# Altium PCB Motherboard.PcbDoc
Units mm, origin at the board's own origin, x right, y up, seen from the top; angles counter-clockwise.
Board outline 177.04 x 126.34 mm, 2 copper layers (Top Layer, Bottom Layer); 49 components, 103 nets, 464 pads, 0 vias.
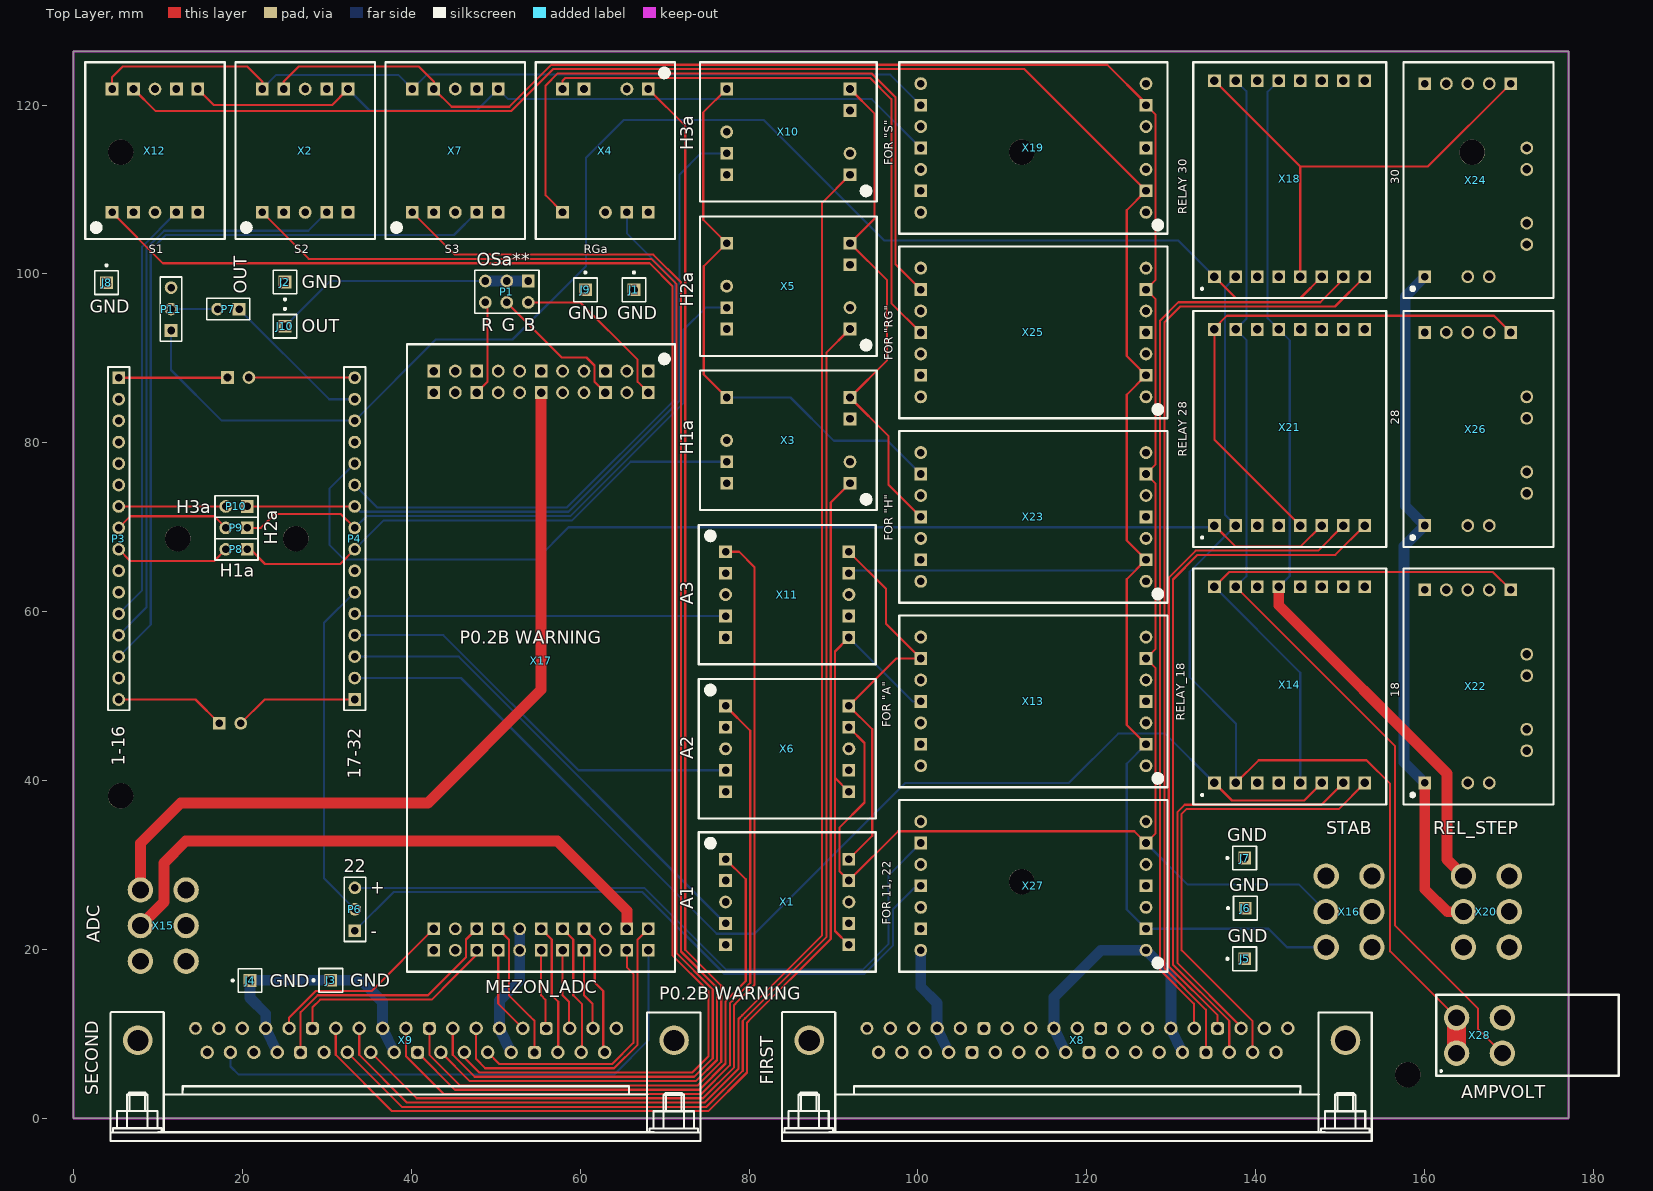
[diagram p0: Top Layer view]
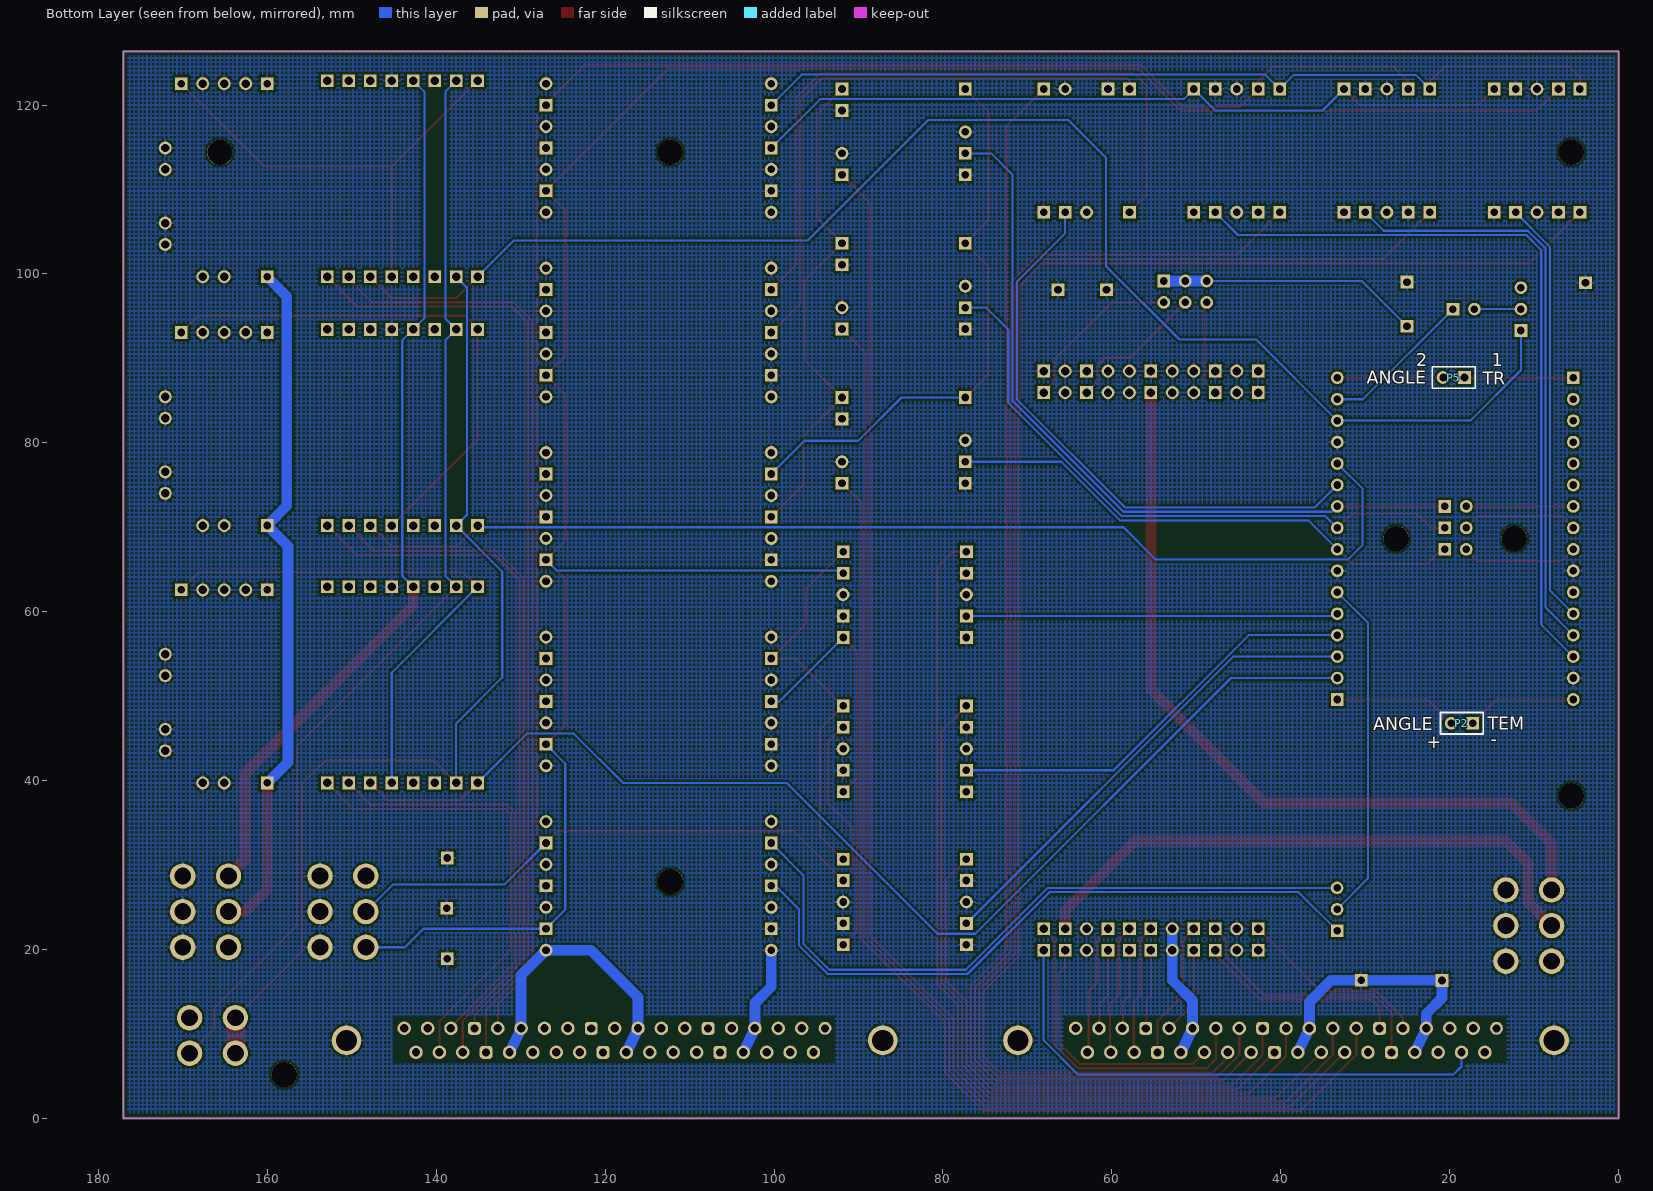
[diagram p1: Bottom Layer view, seen from below]

## Layer stack, top to bottom
Top Solder: solder mask 0.0102, Solder Resist, Dk 3.5
Top Layer: signal copper 0.0356
Dielectric 1: dielectric 0.32, FR-4, Dk 4.8
Bottom Layer: signal copper 0.0356
Bottom Solder: solder mask 0.0102, Solder Resist, Dk 3.5

## Board outline
0,0 177.038,0 177.038,126.34 0,126.34

## Design rules (kind name [scope] priority, off if disabled: settings)
Clearance [All] p1: gap=0.125
PolygonConnect [All] p1: connectstyle=Relief reliefconductorwidth=0.254 reliefentries=4 polygonreliefangle="90 Angle" airgapwidth=0.254
RoutingVias [All] p1: holewidth=0.711 width=1.27 viastyle="Through Hole" minholewidth=0.711 minwidth=1.27 maxholewidth=0.711 maxwidth=1.27
SolderMaskExpansion [All] p1: expansion=0.102
Width [All] p1: maxlimit=2.254 minlimit=0.127 preferedwidth=0.254
29 further rules are at their usual default settings.

## Components (designator, comment, footprint, x,y, rotation, side; value= is the part's Value field where it differs from the comment)
J1 "GND" PIN1 66.37,98.12 r0 top
J2 "GND" PIN1 25.044,99.035 r180 top
J3 "GND" PIN1 30.48,16.358 r90 top
J4 "GND" PIN1 20.904,16.332 r90 top
J5 "GND" PIN1 138.684,18.898 r90 top
J6 "GND" PIN1 138.76,24.902 r90 top
J7 "GND" PIN1 138.684,30.836 r90 top
J8 "GND" PIN1 3.912,98.958 r0 top
J9 "GND" PIN1 60.626,98.12 r0 top
J10 "OUT" PIN1 25.044,93.802 r0 top (schematic designator J4)
P1 "ADC_CH" HDR2X3 53.848,99.162 r180 top
P2 "TEM" HDR1X2 17.272,46.787 r0 bottom
P3 "1-16" HDR1X16 5.359,87.706 r270 top
P4 "17-32" HDR1X16 33.299,49.606 r90 top
P5 "TR" HDR1X2 18.237,87.732 r0 bottom
P6 "22" HDR1X3 33.325,22.225 r90 top
P7 "" HDR1X2 19.609,95.834 r180 top
P8 "H1a" HDR1X2 20.574,67.386 r180 top
P9 "H2a" HDR1X2 20.574,69.926 r180 top
P10 "H3a" HDR1X2 20.574,72.466 r180 top
P11 "" HDR1X3 11.557,93.294 r90 top
X1 "A1" MEZON_V 77.216,30.709 r0 top
X2 "S2" MEZON_V 22.352,107.29 r90 top
X3 "H1a" MEZON_H 91.948,75.209 r180 top
X4 "RGa" MEZON_H 68.072,121.895 r270 top
X5 "H2a" MEZON_H 91.948,93.472 r180 top
X6 "A2" MEZON_V 77.216,48.844 r0 top
X7 "S3" MEZON_V 40.132,107.29 r90 top
X8 "FIRST" CHEAP_CONN_FEMALE 150.622,9.246 r180 top
X9 "SECOND" CHEAP_CONN_FEMALE 71.12,9.246 r180 top
X10 "H3a" MEZON_H 91.948,111.735 r180 top
X11 "A3" MEZON_V 77.216,67.107 r0 top
X12 "S1" MEZON_V 4.572,107.29 r90 top
X13 "FOR \"A\"" MEZON_V+H 127,41.758 r180 top
X14 "RELAY_18" RELAY_MODULE 152.908,39.726 r90 top
X15 "ADC" POWER 15.545,22.835 r90 top
X16 "STAB" POWER 155.956,24.486 r90 top
X17 "MEZON_ADC" MEZON_ADC 68.072,88.494 r270 top
X18 "RELAY 30" RELAY_MODULE 152.908,99.67 r90 top
X19 "FOR \"S\"" MEZON_V+H 127,107.29 r180 top
X20 "REL_STEP" POWER 172.212,24.486 r90 top
X21 "RELAY 28" RELAY_MODULE 152.908,70.206 r90 top
X22 "18" MEZON_STEP-UP 160.02,39.726 r90 top
X23 "FOR \"H\"" MEZON_V+H 127,63.602 r180 top
X24 "30" MEZON_STEP-UP 160.02,99.67 r90 top
X25 "FOR \"RG\"" MEZON_V+H 127,85.446 r180 top
X26 "28" MEZON_STEP-UP 160.02,70.206 r90 top
X27 "FOR 11, 22" MEZON_V+H 127,19.914 r180 top
X28 "AMPVOLT" AMP_VOLTMETER 163.779,7.722 r90 top

## Footprints (in the part's own frame and the unit in brackets; to place one, negate y for a bottom-side part, rotate by r counter-clockwise, add the part's x,y. Pads: shape width x height; smd on the part's side, far side on the other; paste and mask are expansions set on the pad)
AMP_VOLTMETER [mm] "AMP_VOLTMETER"
  round 3 hole 2: 1(0,0) 2(0,-5.423) 3(4.2,-5.423) 4(4.2,0)
  silkscreen extent -2.66,-19.17 6.94,2.42
CHEAP_CONN_FEMALE [mm] "CHEAP_CONN_FEMALE"
  round 1.6 hole 1: 1(6.833,-1.422) 2(9.601,-1.422) 3(12.37,-1.422) 5(17.907,-1.422) 6(20.676,-1.422) 7(23.444,-1.422) 8(26.213,-1.422) 10(31.75,-1.422) 11(34.519,-1.422) 12(37.287,-1.422) 13(40.056,-1.422) 15(45.593,-1.422) 16(48.362,-1.422) 17(51.13,-1.422) 18(53.899,-1.422) 20(8.23,1.422) 21(10.998,1.422) 22(13.767,1.422) 24(19.304,1.422) 25(22.073,1.422) 26(24.841,1.422) 27(27.61,1.422) 29(33.147,1.422) 30(35.916,1.422) 31(38.684,1.422) 32(41.453,1.422) 34(46.99,1.422) 35(49.759,1.422) 36(52.527,1.422) 37(55.296,1.422)
  rrect50% 1.524x1.524 hole 0.965: 4(15.138,-1.422) 9(28.981,-1.422) 14(42.824,-1.422) 23(16.535,1.422) 28(30.378,1.422) 33(44.221,1.422)
  round 1.524 hole 0.965: 19(56.667,-1.422)
  round 3.5 hole 2.5: 38(0,0) 39(63.5,0)
  silkscreen extent -3.11,-3.36 66.72,11.92
HDR1X2 [mm] "Connector; Header; 2 Position"
  rect 1.5x1.5 hole 0.9: 1(0,0)
  round 1.5 hole 0.9: 2(2.54,0)
  silkscreen extent -1.27,-1.27 3.81,1.27
HDR1X3 [mm] "Connector; Header; 3 Position"
  rect 1.5x1.5 hole 0.9: 1(0,0)
  round 1.5 hole 0.9: 2(2.54,0) 3(5.08,0)
  silkscreen extent -1.27,-1.27 6.35,1.27
HDR1X16 [mm] "Connector; Header; 16 Position"
  rect 1.5x1.5 hole 0.9: 1(0,0)
  round 1.5 hole 0.9: 2(2.54,0) 3(5.08,0) 4(7.62,0) 5(10.16,0) 6(12.7,0) 7(15.24,0) 8(17.78,0) 9(20.32,0) 10(22.86,0) 11(25.4,0) 12(27.94,0) 13(30.48,0) 14(33.02,0) 15(35.56,0) 16(38.1,0)
  silkscreen extent -1.27,-1.27 39.37,1.27
HDR2X3 [mm] "Connector; Header; 3x2 Position"
  rect 1.5x1.5 hole 0.9: 1(0,0)
  round 1.5 hole 0.9: 2(0,2.54) 3(2.54,0) 4(2.54,2.54) 5(5.08,0) 6(5.08,2.54)
  silkscreen extent -1.27,-1.27 6.35,3.81
MEZON_ADC [mm] "MEZON_ADC"
  rect 1.5x1.5 hole 1: 1(0,0) 2(2.54,0) 5(0,-5.08) 6(2.54,-5.08) 11(0,-12.7) 12(2.54,-12.7) 17(0,-20.32) 18(2.54,-20.32) 21(0,-25.4) 22(2.54,-25.4) 23(66.04,-25.4) 24(68.58,-25.4) 27(66.04,-20.32) 28(68.58,-20.32) 29(66.04,-17.78) 30(68.58,-17.78) 33(66.04,-12.7) 34(68.58,-12.7) 35(66.04,-10.16) 36(68.58,-10.16) 37(66.04,-7.62) 38(68.58,-7.62) 41(66.04,-2.54) 42(68.58,-2.54) 43(66.04,0) 44(68.58,0)
  round 1.524 hole 1: 3(0,-2.54) 4(2.54,-2.54) 7(0,-7.62) 8(2.54,-7.62) 9(0,-10.16) 10(2.54,-10.16) 13(0,-15.24) 14(2.54,-15.24) 15(0,-17.78) 16(2.54,-17.78) 19(0,-22.86) 20(2.54,-22.86) 25(66.04,-22.86) 26(68.58,-22.86) 31(66.04,-15.24) 32(68.58,-15.24) 39(66.04,-5.08) 40(68.58,-5.08)
  silkscreen extent -3.18,-28.57 71.12,3.18
MEZON_H [mm]
  rect 1.5x1.5 hole 0.9: 1(0,0) 3(0,-7.62) 4(0,-10.16) 5(14.605,-10.16) 7(14.605,-2.54) 8(14.605,0)
  round 1.524 hole 0.9: 2(0,-2.54) 6(14.605,-5.08)
  silkscreen extent -3.18,-13.33 17.78,3.18
MEZON_STEP-UP [mm] "MEZON_STEP-UP"
  rect 1.5x1.5 hole 0.9: 1(0,0) 8(22.86,-10.16) 12(22.86,0)
  round 1.524 hole 1: 2(0,-5.08) 3(0,-7.62) 4(3.81,-12.065) 5(6.35,-12.065) 6(12.7,-12.065) 7(15.24,-12.065) 9(22.86,-7.62) 10(22.86,-5.08) 11(22.86,-2.54)
  silkscreen extent -2.54,-15.24 25.4,2.54
MEZON_V [mm]
  rect 1.5x1.5 hole 0.9: 1(0,0) 2(0,-2.54) 4(0,-7.62) 5(0,-10.16) 6(14.605,-10.16) 7(14.605,-7.62) 9(14.605,-2.54) 10(14.605,0)
  round 1.524 hole 0.9: 3(0,-5.08) 8(14.605,-5.08)
  silkscreen extent -3.17,-13.33 17.78,3.17
MEZON_V+H [mm] "MEZON_V+H"
  round 1.524 hole 0.9: 1(0,0) 3(0,-5.08) 5(0,-10.16) 7(0,-15.24) 8(26.67,-15.24) 10(26.67,-10.16) 12(26.67,-5.08) 14(26.67,0)
  rect 1.5x1.5 hole 0.9: 2(0,-2.54) 4(0,-7.62) 6(0,-12.7) 9(26.67,-12.7) 11(26.67,-7.62) 13(26.67,-2.54)
  silkscreen extent -2.54,-17.78 29.21,2.54
PIN1 [mm] "Connector; Plug"
  rect 1.5x1.5 hole 0.9: 1(0,0)
  silkscreen extent -1.4,-1.4 1.4,2.17
POWER [mm] "POWER"
  round 3 hole 2: 1(4.217,7.62) 2(0,7.62) 3(-4.217,7.62) 4(4.217,2.198) 5(0,2.198) 6(-4.217,2.198)
RELAY_MODULE [mm]
  rect 1.5x1.5 hole 1: 1(0,17.805) 2(0,15.265) 3(0,12.725) 4(0,10.185) 5(0,7.645) 6(0,5.105) 7(0,2.54) 8(0,0) 9(23.216,0.025) 10(23.216,2.565) 11(23.216,5.105) 12(23.216,7.645) 13(23.216,10.185) 14(23.216,12.725) 15(23.216,15.265) 16(23.216,17.805)
  silkscreen extent -2.54,-2.54 25.4,20.32

## Part data
J1 J2 J3 J4 J5 J6 J7 J8 J9 J10: library part Socket, "Socket"
P1: library part "Header 3X2", "Header, 3-Pin, Dual row"
P2 P5 P7 P8 P9 P10: library part "Header 2", "Header, 2-Pin"
P3 P4: library part "Header 16", "Header, 16-Pin"
P6 P11: library part "Header 3", "Header, 3-Pin"
X1 X2 X6 X7: library part MEZON_V_+15
X3 X4 X5 X10: library part MEZON_H
X8 X9: library part CHEAP_CON_37_FEMALE
X11 X12: library part MEZON_V
X13 X19 X23 X25 X27: library part MEZON_V+H
X14 X18 X21: library part MEZON_RELAY
X15 X16 X20: library part POWER
X22 X24 X26: library part MEZON_STEP-UP
X28: library part AMP_VOLTMETER

## Free pads (board coordinates)
  round 3 hole 3 unplated: 0(5.588,38.202) 0(5.588,114.402) 0(12.344,68.656) 0(26.314,68.656) 0(112.268,28.042) 0(112.268,114.402) 0(157.988,5.182) 0(165.608,114.402)

## Nets (pads, with @x,y where several pads share a name; then routed paths per layer and width w, separated by ;. In a path a pad name is that pad's centre, name@x,y a point inside that pad or via, vN(x,y) a via of type N, cw(c..) or ccw(c..) an arc to the next point about the centre after c; other vN are vias at no path point)
AMPER_+: X14.15 X18.15 X21.15 X28.2 | length 130.3
  Top Layer w0.254: X14.15 156.464,44.12 156.464,22.86 166.294,13.03 166.294,10.63 X28.2
  Bottom Layer w0.254: X14.15 138.887,64.186 138.887,70.612 138.913,70.637 138.913,92.151 X21.15 138.887,94.666 138.887,121.641 X18.15
AMPER_-: X14.2 X18.2 X21.2 X28.1 X28.4 | length 121.2
  Top Layer w0.254: X14.2 140.335,42.418 153.111,42.418 155.905,39.624 155.905,19.796 X28.4
  Top Layer w2.254: X28.1 X28.4
  Bottom Layer w0.254: X14.2 137.643,46.761 132.182,52.222 132.182,64.745 X21.2 136.347,71.501 136.347,98.374 X18.2
GND: J1.1 J2.1 J3.1 J4.1 J5.1 J6.1 J7.1 J8.1 J9.1 P3.10 P3.15 P4.7 P4.13 X1.2 X1.3 X1.5 X1.7 X1.8 X2.2 X2.3 X2.5 X2.7 X2.8 X3.2 X3.3 X3.6 X3.8 X4.2 X4.3 X4.6 X4.8 X5.2 X5.3 X5.6 X5.8 X6.2 X6.3 X6.5 X6.7 X6.8 X7.2 X7.3 X7.5 X7.7 X7.8 X8.6 X8.11 X8.16 X8.24 X8.29 X8.34 X8.38 X8.39 X9.6 X9.11 X9.16 X9.24 X9.29 X9.34 X9.38 X9.39 X10.2 X10.3 X10.6 X10.8 X11.2 X11.3 X11.5 X11.7 X11.8 X12.2 X12.3 X12.5 X12.7 X12.8 X13.1 X13.3 X13.4 X13.5 X13.7 X13.8 X13.10 X13.12 X13.13 X13.14 X14.12 X15.4 X15.5 X15.6 X16.4 X16.5 X16.6 X17.1 X17.3 X17.4 X17.5 X17.7 X17.8 X17.9 X17.10 X17.11 X17.13 X17.14 X17.15 X17.16 X17.17 X17.19 X17.20 X17.21 X17.22 X17.24 X17.25 X17.26 X17.31 X17.32 X17.39 X17.40 X18.12 X19.1 X19.3 X19.4 X19.5 X19.7 X19.8 X19.10 X19.12 X19.13 X19.14 X20.4 X20.5 X20.6 X21.12 X22.2 X22.3 X22.4 X22.5 X22.6 X22.7 X22.9 X22.10 X22.11 X22.12 X23.1 X23.3 X23.4 X23.5 X23.7 X23.8 X23.10 X23.12 X23.13 X23.14 X24.2 X24.3 X24.4 X24.5 X24.6 X24.7 X24.9 X24.10 X24.11 X24.12 X25.1 X25.3 X25.4 X25.5 X25.7 X25.8 X25.10 X25.12 X25.13 X25.14 X26.2 X26.3 X26.4 X26.5 X26.6 X26.7 X26.9 X26.10 X26.11 X26.12 X27.1 X27.3 X27.4 X27.5 X27.7 X27.8 X27.10 X27.12 X27.13 X27.14 | length 95.4
  Bottom Layer w1.27: X9.34 X9.16 22.758,12.395 20.904,14.249 J4.1 20.93,16.358 J3.1 34.036,16.358 36.601,13.792 X9.11 X9.29 ; X9.24 X9.6 50.444,13.97 52.832,16.358 X17.32 X17.31 ; X27.14 100.33,15.596 102.26,13.665 X8.16 X8.34 ; X8.29 X8.11 116.103,14.351 121.666,19.914 X27.1 129.946,16.967 X8.6 X8.24
HIGH_A: X1.10 X6.10 X11.10 X13.9 | length 47.4
  Top Layer w0.254: X1.10 94.59,33.477 94.59,46.076 X6.10 97.434,54.458 X13.9 96.215,58.572 96.215,62.713 X11.10
HIGH_H: X3.5 X5.5 X10.5 X23.9 | length 67.8
  Top Layer w0.254: X3.5 74.625,88.087 74.625,100.914 X5.5 74.574,106.401 74.574,119.126 X10.5
  Bottom Layer w0.254: X3.5 84.912,85.369 90.043,80.239 96.393,80.239 X23.9
HIGH_RG: X4.5 X25.9 | length 83.1
  Top Layer w0.254: X4.5 55.905,109.296 55.905,122.301 57.353,123.749 94.495,123.749 97.358,120.886 97.358,101.117 X25.9
HIGH_S: X2.10 X7.10 X12.10 X19.9 | length 102.9
  Top Layer w0.254: X12.10 4.572,123.292 5.842,124.562 20.574,124.562 22.352,122.784 X2.10
  Bottom Layer w0.254: X2.10 24.028,123.571 38.456,123.571 X7.10 41.834,123.596 96.723,123.596 X19.9
LOW_A: X1.6 X6.6 X11.6 X13.11 | length 51.7
  Top Layer w0.254: X1.6 90.17,22.2 90.17,40.335 ; X6.6 90.17,40.335 ; X11.6 90.17,55.296 90.17,40.335
  Bottom Layer w0.254: X11.6 99.39,49.378 X13.11
LOW_H: X3.4 X5.4 X10.4 X23.11 | length 60.2
  Top Layer w0.254: X10.4 94.869,118.974 94.869,106.553 X5.4 96.342,99.238 96.342,89.764 X3.4 96.495,80.823 96.495,75.057 X23.11
LOW_RG: X4.4 X25.11 | length 70.1
  Top Layer w0.254: X4.4 57.912,122.86 58.242,123.19 94.336,123.19 96.85,120.675 96.85,96.545 X25.11
LOW_S: X2.6 X7.6 X12.6 X19.11 | length 92.2
  Top Layer w0.254: X12.6 16.637,119.99 30.607,119.99 X2.6
  Bottom Layer w0.254: X2.6 35.052,119.355 47.752,119.355 X7.6 51.486,120.701 94.539,120.701 X19.11
NetJ10_1: J10.1 P1.1 P1.3 P1.5 | length 31
  Bottom Layer w0.254: J10.1 30.404,99.162 P1.5
  Bottom Layer w1.27: P1.5 P1.3 P1.1
NetP6_1: P6.1 X27.11 | length 79.7
  Bottom Layer w0.254: P6.1 37.897,26.797 67.379,26.797 77.082,17.094 93.657,17.094 97.028,20.465 97.028,24.74 99.822,27.534 X27.11
NetP6_3: P6.3 X27.9 | length 82
  Bottom Layer w0.254: P6.3 67.589,27.305 77.292,17.602 93.447,17.602 96.52,20.676 96.52,28.804 X27.9
P0.0: X8.15
P0.0_2: X9.15 X17.23 | length 22.8
  Top Layer w0.254: X9.15 25.527,11.913 28.702,15.088 34.544,15.088 35.306,15.088 X17.23
P0.1: X8.33
P0.1_2: X9.33 X17.27 | length 30.9
  Top Layer w0.254: X9.33 26.899,12.566 28.912,14.58 41.986,14.58 46.482,19.075 46.482,21.184 X17.27
P0.2: X8.14
P0.2_2: X9.14 X17.28 | length 25
  Top Layer w0.254: X9.14 28.296,13.157 29.21,14.072 42.418,14.072 44.853,16.506 45.212,16.866 47.752,19.406 X17.28
P0.3: X8.32
P0.3_2: X9.32
P0.4: X8.13
P0.4_2: X3.1 X9.13 | length 132.1
  Top Layer w0.254: X9.13 31.064,7.525 37.725,0.864 75.177,0.864 79.756,5.443 79.756,10.008 ; 79.756,9.246 79.756,11.347 79.912,11.503 89.662,21.253 89.662,72.923 X3.1
P0.5: X8.31
P0.5_2: X5.1 X9.31 | length 144.8
  Top Layer w0.254: X9.31 38.887,1.372 74.966,1.372 79.248,5.653 79.248,10.008 ; 79.248,9.525 79.248,11.557 79.553,11.862 89.154,21.463 89.154,76.352 89.154,90.678 X5.1
P0.6: X8.12
P0.6_2: X9.12 X10.1 | length 164
  Top Layer w0.254: X9.12 33.833,7.525 39.478,1.88 74.756,1.88 78.74,5.864 78.74,10.008 ; 78.74,9.347 78.74,11.767 79.194,12.221 88.646,21.673 88.646,94.539 88.646,108.433 X10.1
P0.7: X8.30
P0.7_2: X9.30 X11.1 | length 111.2
  Top Layer w0.254: X9.30 40.64,2.388 74.545,2.388 78.232,6.074 78.232,10.008 78.232,13.429 78.363,13.56 80.645,15.842 80.645,65.278 78.816,67.107 X11.1
P1.0: X8.10
P1.0_2: X6.1 X9.10 | length 89.7
  Top Layer w0.254: X9.10 39.37,7.355 43.83,2.896 74.335,2.896 77.724,6.285 77.724,10.008 77.724,13.64 78.003,13.919 80.137,16.053 80.137,42.748 80.137,45.923 X6.1
P1.1: X8.28
P1.1_2: X1.1 X9.28 | length 65.8
  Top Layer w0.254: X9.28 45.161,3.404 74.124,3.404 77.216,6.495 77.216,10.008 77.216,13.886 77.626,14.296 79.604,16.274 79.604,28.321 X1.1
P1.2: X8.9
P1.2_2: X4.1 X9.9 | length 160.2
  Top Layer w0.254: X9.9 42.139,7.525 45.752,3.912 73.914,3.912 76.708,6.706 76.708,11.1 ; X4.1 72.441,117.526 72.441,99.263 72.441,19.972 76.153,16.26 76.708,15.704 76.708,10.008
P1.3: X8.27
P1.3_2: X7.1 X9.27 | length 164.2
  Top Layer w0.254: X7.1 45.136,102.286 53.111,102.286 68.645,102.286 71.933,98.998 71.933,19.761 75.794,15.9 76.2,15.494 76.2,10.008 76.2,6.916 73.704,4.42 46.914,4.42 X9.27
P1.4: X8.8
P1.4_2: X2.1 X9.8 | length 181.9
  Top Layer w0.254: X2.1 27.864,101.778 34.29,101.778 68.435,101.778 71.425,98.788 71.425,19.551 75.434,15.541 75.692,15.284 75.692,10.008 75.692,7.126 73.493,4.928 47.504,4.928 44.907,7.525 X9.8
P1.5: X8.26
P1.5_2: X9.26 X12.1 | length 194
  Top Layer w0.254: X12.1 10.592,101.27 55.016,101.27 68.224,101.27 70.917,98.577 70.917,19.34 75.075,15.182 75.184,15.073 75.184,10.008 75.184,7.337 73.283,5.436 48.05,5.436 46.279,7.206 X9.26
P1.6: X8.7
P1.6_2: X9.7 X17.43 | length 38.6
  Top Layer w0.254: X9.7 47.676,7.036 48.768,5.944 64.008,5.944 66.802,8.738 66.802,18.644 66.802,21.184 X17.43
P1.7: X8.25
P1.7_2: X9.25 X17.42 | length 30.1
  Top Layer w0.254: X9.25 50.419,6.452 63.798,6.452 66.294,8.948 66.294,17.12 65.532,17.882 65.532,18.39 X17.42
P2.0: X8.5 X18.7 | length 109.5
  Top Layer w0.254: X8.5 132.664,10.719 132.664,13.589 128.676,17.577 128.676,94.488 130.835,96.647 147.65,96.647 150.368,99.365 X18.7
P2.0_2: X9.5 X17.30 | length 10.5
  Top Layer w0.254: X17.30 50.292,18.39 50.292,13.589 X9.5
P2.1: X8.23 X18.8 | length 114.4
  Top Layer w0.254: X8.23 134.087,12.885 129.184,17.787 129.184,94.278 131.046,96.139 149.377,96.139 X18.8
P2.1_2: X9.23 X17.29 | length 17.1
  Top Layer w0.254: X17.29 51.562,21.184 51.562,19.914 51.562,14.58 54.102,12.04 54.61,11.532 54.61,8.992 54.61,7.468 54.585,7.493 X9.23
P2.2: X8.4 X21.7 | length 79
  Top Layer w0.254: X8.4 135.484,12.206 129.692,17.998 129.692,64.033 132.893,67.234 147.396,67.234 X21.7
P2.2_2: X9.4 X17.34 | length 9.5
  Top Layer w0.254: X17.34 55.372,17.374 55.372,14.58 55.88,14.072 55.88,10.77 X9.4
P2.3: X8.22 X21.8 | length 84.1
  Top Layer w0.254: X8.22 136.855,11.553 130.2,18.208 130.2,63.823 133.103,66.726 149.428,66.726 X21.8
P2.3_2: X9.22 X17.33 | length 15.5
  Top Layer w0.254: X17.33 56.642,21.184 56.642,20.93 56.642,14.58 57.15,14.072 57.404,13.818 57.404,11.278 57.404,7.874 X9.22
P2.4: X8.3 X14.7 | length 49.8
  Top Layer w0.254: X8.3 138.252,10.875 130.708,18.418 130.708,36.271 131.572,37.135 147.777,37.135 X14.7
P2.4_2: X9.3 X17.36 | length 9.9
  Top Layer w0.254: X17.36 57.912,14.58 58.166,14.326 58.674,13.818 58.674,11.849 58.674,10.516 58.674,10.592 X9.3
P2.5: X8.21 X14.8 | length 54.9
  Top Layer w0.254: X8.21 139.624,11.506 131.216,19.914 131.216,36.061 131.782,36.627 149.809,36.627 X14.8
P2.5_2: X9.21 X17.35 | length 15.8
  Top Layer w0.254: X17.35 59.182,21.184 59.182,20.422 59.182,14.58 60.198,13.564 60.198,9.754 60.198,7.722 60.122,7.798 X9.21
P2.6: X8.2
P2.6_2: X9.2 X17.38 | length 9.7
  Top Layer w0.254: X17.38 60.452,14.58 61.468,13.564 61.468,11.849 61.468,10.719 X9.2
P2.7: X8.20
P2.7_2: X9.20 X17.37 | length 15.6
  Top Layer w0.254: X17.37 61.722,21.184 61.722,20.168 61.722,16.104 62.738,15.088 62.738,9.754 62.738,7.976 X9.20
PFI1: X8.36
PFI1_2: X9.36 X17.44 | length 63.9
  Bottom Layer w0.254: X9.36 18.593,6.147 19.558,5.182 64.008,5.182 68.072,9.246 X17.44
PFI2: X8.17
PFI2_2: X9.17
PFI3: X8.35
PFI3_2: X9.35
PH_A1: P4.3 X1.4 | length 57
  Bottom Layer w0.254: P4.3 45.618,54.686 X1.4
PH_A2: P4.4 X6.4 | length 50.5
  Bottom Layer w0.254: P4.4 43.797,57.226 59.799,41.224 X6.4
PH_A3: P4.5 X11.4 | length 44
  Bottom Layer w0.254: P4.5 33.579,59.487 X11.4
PH_DDA: P4.14 P11.1 X18.1 X18.6 | length 175.4
  Top Layer w0.254: X18.1 137.617,97.155 145.288,97.155 X18.6
  Bottom Layer w0.254: P11.1 11.557,88.621 17.551,82.626 P4.14 42.901,92.227 51.994,92.227 60.706,100.94 60.706,113.792 65.126,118.212 81.763,118.212 96.012,103.962 130.81,103.962 X18.1
PH_H1A: P4.8 P8.1 X3.7 | length 62.5
  Top Layer w0.254: P8.1 20.955,67.386 22.682,65.659 31.572,65.659 P4.8
  Bottom Layer w0.254: P4.8 36.728,70.815 59.044,70.815 65.978,77.749 X3.7
PH_H1B: P3.7 P10.2 | length 12.7
  Top Layer w0.254: P3.7 P10.2
PH_H2A: P4.9 P9.1 X5.7 | length 74
  Top Layer w0.254: P9.1 22.174,69.926 23.8,71.552 31.674,71.552 P4.9
  Bottom Layer w0.254: P4.9 34.696,71.323 58.834,71.323 72.263,84.753 72.263,93.421 74.854,96.012 X5.7
PH_H2B: P3.8 P9.2 | length 13.8
  Top Layer w0.254: P3.8 6.731,71.298 16.662,71.298 P9.2
PH_H3A: P4.10 P10.1 X10.7 | length 90.3
  Top Layer w0.254: P10.1 P4.10
  Bottom Layer w0.254: P4.10 33.934,71.831 58.623,71.831 71.755,84.963 71.755,111.735 74.295,114.275 X10.7
PH_H3B: P3.9 P8.2 | length 13.8
  Top Layer w0.254: P3.9 6.756,65.989 16.637,65.989 P8.2
PH_OBA: P4.6 P6.2 | length 40.6
  Bottom Layer w0.254: P4.6 29.667,58.674 29.667,28.426 P6.2@33.326,24.767
PH_OSA: P4.15 P7.1 | length 18.1
  Bottom Layer w0.254: P7.1 30.277,85.166 P4.15
PH_OSA_S: P7.2 P11.2 | length 5.5
  Bottom Layer w0.254: P11.2 P7.2
PH_PD: P4.2 X14.1 X14.6 | length 141
  Top Layer w0.254: X14.1 137.185,37.643 145.72,37.643 X14.6
  Bottom Layer w0.254: P4.2 45.896,52.146 76.173,21.869 80.645,21.869 98.501,39.726 117.856,39.726 123.698,45.568 129.261,45.568 X14.1
PH_RDA: P4.12 X21.1 X21.6 | length 132.7
  Top Layer w0.254: X21.1 137.566,67.742 145.339,67.742 X21.6
  Bottom Layer w0.254: P4.12 30.302,74.549 30.302,67.92 32.055,66.167 54.788,66.167 58.623,70.002 X21.1@135.103,70.002
PH_RGA: P4.11 X4.7 | length 68.9
  Bottom Layer w0.254: P4.11 35.966,72.339 58.413,72.339 71.247,85.173 71.247,99.085 65.532,104.8 X4.7
PH_S1: P3.12 X12.4 | length 50.4
  Bottom Layer w0.254: P3.12 8.128,62.535 8.128,103.226 X12.4
PH_S2: P3.13 X2.4 | length 70.3
  Bottom Layer w0.254: P3.13 8.636,60.503 8.636,103.015 10.735,105.114 27.797,105.114 X2.4
PH_S3: P3.14 X7.4 | length 90.2
  Bottom Layer w0.254: P3.14 9.144,58.471 9.144,102.805 10.946,104.606 45.069,104.606 X7.4
PH_TEM+: P2.2 P4.1 | length 14.7
  Top Layer w0.254: P2.2 22.631,49.606 P4.1
PH_TEM-: P2.1 P3.16 | length 13.1
  Top Layer w0.254: P3.16 14.453,49.606 P2.1
PH_TR1: P3.1 P5.1 | length 12.9
  Top Layer w0.254: P3.1 18.212,87.706 P5.1
PH_TR2: P4.16 P5.2 | length 12.5
  Top Layer w0.254: P5.2 33.274,87.732 P4.16
PWR_ANALOG: X15.1 X17.12 | length 95.7
  Top Layer w1.27: X15.1 7.925,32.588 12.7,37.363 41.986,37.363 55.372,50.749 X17.12
PWR_DIGITAL: X15.2 X17.41 | length 70
  Top Layer w1.27: X15.2 10.719,25.629 10.719,30.251 13.31,32.842 57.277,32.842 65.532,24.587 X17.41
PWR_RELAY: X14.13 X18.13 X20.1 X21.13 | length 105.4
  Top Layer w1.27: X14.13 142.723,60.757 162.636,40.843 162.636,30.659 X20.1
  Bottom Layer w0.254: X14.13 144.018,64.237 144.018,92.126 X21.13 141.402,94.742 141.402,121.564 X18.13
PWR_STAB++: X1.9 X2.9 X6.9 X7.9 X13.6 X16.2 X19.6 X23.6 X25.6 X27.6 | length 285
  Top Layer w0.254: X2.9 24.892,122.784 26.67,124.562 40.894,124.562 42.672,122.784 X7.9 44.78,119.786 51.606,119.786 56.584,124.765 122.41,124.765 127,120.175 X19.6 128.143,118.847 128.143,99.289 X25.6 128.143,97.003 128.143,77.445 X23.6 128.143,75.159 128.143,55.601 X13.6 128.143,53.315 128.143,33.757 X27.6 125.603,34.011 97.663,34.011 X1.9 90.69,29.3 90.69,34.429 93.675,37.414 93.675,44.45 X6.9
  Bottom Layer w0.254: X27.6 131.928,27.686 145.136,27.686 X16.2
PWR_STAB---: X11.9 X12.9 X13.2 X16.3 X19.2 X23.2 X25.2 X27.2 | length 282
  Top Layer w0.254: X12.9 9.728,119.278 51.816,119.278 56.794,124.257 112.573,124.257 X19.2 124.714,107.544 124.714,90.272 X25.2 124.714,85.7 124.714,68.428 X23.2 124.714,63.856 124.714,46.584 X13.2
  Bottom Layer w0.254: X11.9 92.126,64.872 125.73,64.872 X23.2 ; X13.2 124.714,42.012 124.714,24.74 X27.2 141.503,22.454 143.689,20.268 X16.3
PWR_STEP-UP: X20.2 X22.1 X24.1 X26.1 | length 82.2
  Top Layer w1.27: X22.1 160.02,27.153 162.687,24.486 X20.2
  Bottom Layer w1.27: X22.1 157.556,42.189 157.556,67.742 X26.1 157.683,72.542 157.683,97.333 X24.1
STEP_18: X14.5 X14.16 X22.8 | length 64.1
  Top Layer w0.254: X14.16 136.855,64.694 168.072,64.694 X22.8
  Bottom Layer w0.254: X14.16 145.263,52.781 X14.5
STEP_28: X21.5 X21.16 X26.8 | length 64.1
  Top Layer w0.254: X21.5 135.103,80.366 X21.16 135.103,93.574 136.576,95.047 168.199,95.047 X26.8
STEP_30: X18.5 X18.16 X24.8 | length 56.4
  Top Layer w0.254: X18.16 145.263,112.725 ; X18.5 145.263,112.725 ; X24.8 160.376,112.725 145.263,112.725
VINB: P1.2 X17.2 | length 20.2
  Top Layer w0.254: P1.2 60.02,96.622 66.802,89.84 66.802,87.224 X17.2
VING: P1.4 X17.6 | length 17.2
  Top Layer w0.254: P1.4 57.836,90.094 60.757,90.094 61.697,89.154 61.697,87.249 X17.6
VINR: P1.6 X17.18 | length 11.3
  Top Layer w0.254: X17.18 49.022,87.224 49.022,96.368 P1.6
pads on no net: P3.2 P3.3 P3.4 P3.5 P3.6 P3.11 P11.3 X8.1 X8.18 X8.19 X8.37 X9.1 X9.18 X9.19 X9.37 X14.3 X14.4 X14.9 X14.10 X14.11 X14.14 X15.3 X16.1 X18.3 X18.4 X18.9 X18.10 X18.11 X18.14 X20.3 X21.3 X21.4 X21.9 X21.10 X21.11 X21.14 X28.3

## Polygon pours and split planes (outlines as drawn)
GND on Bottom Layer "Top Layer-No Net" (hatched 90Degree grid 0.508 track 0.203, remove dead copper, pour order 5): 0.508,125.832 0.508,0.61 176.53,0.61 176.53,125.832

## Keep-outs
Keep-Out Layer:
  the board outline again, w0.254

## Other copper
Multi-Layer:
  pour cut-out: 13.208,12.294 13.208,6.452 65.786,6.452 65.786,12.294
  pour cut-out: 92.71,12.294 92.71,6.452 145.288,6.452 145.288,12.294

## Silkscreen, mask and mechanical layers (free items; w line width, h text height)
Top Overlay:
  text "OSa**" at 47.752,100.94 h1.52
  text "OUT" at 20.498,97.663 h1.52 r90
  text "R" at 48.26,93.193 h1.52
  text "G" at 50.698,93.193 h1.52
  text "B" at 53.34,93.193 h1.52
  text "P0.2B WARNING" at 45.72,56.236 h1.52
  text "+" at 35.154,26.594 h1.52
  text "-" at 35.23,21.463 h1.52
  text "P0.2B WARNING" at 69.342,14.072 h1.52
Bottom Overlay:
  text "1" at 15.011,89.078 h1.52
  text "2" at 23.927,89.078 h1.52
  text "ANGLE" at 29.82,87.02 h1.52
  text "ANGLE" at 29.032,45.974 h1.52
  text "-" at 15.138,44.171 h1.52
  text "+" at 22.682,43.815 h1.52